# EAGLE board USB (EAGLE 7.6.0)

Size 113.67 x 76.2 mm. Coordinates in mm from the lower left corner, seen from the top.
Copper layers (1*16): Top 0.035mm / dielectric 1.5mm / Bottom 0.035mm
Design rules "default": minimum track width 10mil, minimum drill 24mil, track to track 8mil, track to pad 8mil, pad to pad 8mil, via to via 8mil, smd to smd 8mil, copper to edge 40mil, drill to drill 8mil, minimum pad ring 10mil, minimum via ring 8mil, stop-mask expansion 4mil, vias tented up to drill 0mil, thermal gap 10mil

## Footprints (pad centres in the part's own frame; a part is rotated, then mirrored left to right if it is on the bottom)
USB_TEMPLATE = drill 0.3 pad 0.8: + 11.43,73.66; +@1 36.83,73.66; +@2 62.23,73.66; +@3 17.78,38.1; +@4 43.18,38.1; +@5 68.58,38.1; +@6 93.98,38.1; +@7 24.13,2.54; +@8 49.53,2.54; +@9 74.93,2.54; - 24.13,73.66; -@1 49.53,73.66; -@2 74.93,73.66; -@3 81.28,38.1; -@4 55.88,38.1; -@5 30.48,38.1; -@6 11.43,2.54; -@7 36.83,2.54; -@8 62.23,2.54; -@9 87.63,2.54 | smd 0.635 x 1.27: CTS 87.63,55.245; GND 95.25,55.245; RTS 92.71,55.245; RX 85.09,55.245; TX 82.55,55.245; VREF 90.17,55.245 | smd 0.635 x 1.27 bottom: CTS1 87.63,55.245; GND1 95.25,55.245; RTS1 92.71,55.245; RX1 85.09,55.245; TX1 82.55,55.245; VREF1 90.17,55.245 | smd 1.27 x 0.635: P1 6.985,69.85; P2 6.985,67.31; P3 6.985,64.77; P4 6.985,62.23; P5 6.985,59.69; P6 6.985,57.15; P7 6.985,54.61; P8 6.985,52.07; P9 6.985,49.53; P10 6.985,46.99; P11 6.985,44.45; P12 6.985,41.91; P13 6.985,39.37; P14 6.985,36.83; P15 6.985,34.29; P16 6.985,31.75; P17 6.985,29.21; P18 6.985,26.67; P19 6.985,24.13; P20 6.985,21.59; P21 6.985,19.05; P22 6.985,16.51; P23 6.985,13.97; P24 6.985,11.43; P25 6.985,8.89; P26 6.985,6.35 | smd 1.27 x 0.635 bottom: P1@1 6.985,69.85; P2@1 6.985,67.31; P3@1 6.985,64.77; P4@1 6.985,62.23; P5@1 6.985,59.69; P6@1 6.985,57.15; P7@1 6.985,54.61; P8@1 6.985,52.07; P9@1 6.985,49.53; P10@1 6.985,46.99; P11@1 6.985,44.45; P12@1 6.985,41.91; P13@1 6.985,39.37; P14@1 6.985,36.83; P15@1 6.985,34.29; P16@1 6.985,31.75; P17@1 6.985,29.21; P18@1 6.985,26.67; P19@1 6.985,24.13; P20@1 6.985,21.59; P21@1 6.985,19.05; P22@1 6.985,16.51; P23@1 6.985,13.97; P24@1 6.985,11.43; P25@1 6.985,8.89; P26@1 6.985,6.35 | drill 0.3 pad 1: VIA1 45.085,57.785; VIA2 46.99,57.785; VIA3 48.895,57.785; VIA4 45.085,55.88; VIA5 46.99,55.88; VIA6 48.895,55.88; VIA7 45.085,53.975; VIA8 46.99,53.975; VIA9 48.895,53.975; VIA10 45.085,22.225; VIA11 46.99,22.225; VIA12 48.895,22.225; VIA13 45.085,20.32; VIA14 46.99,20.32; VIA15 48.895,20.32; VIA16 45.085,18.415; VIA17 46.99,18.415; VIA18 48.895,18.415

## Placement (x,y rotation side)
E$1  [USB_TEMPLATE]  0,0 0 top

## Library data of the parts
E$1 = voltera_community_lib